# Altium PCB PCB1.PcbDoc
Units mm, origin at the board's own origin, x right, y up, seen from the top; angles counter-clockwise.
Board outline 90 x 41 mm, 2 copper layers (Top Layer, Bottom Layer); 51 components, 31 nets, 133 pads, 582 vias.
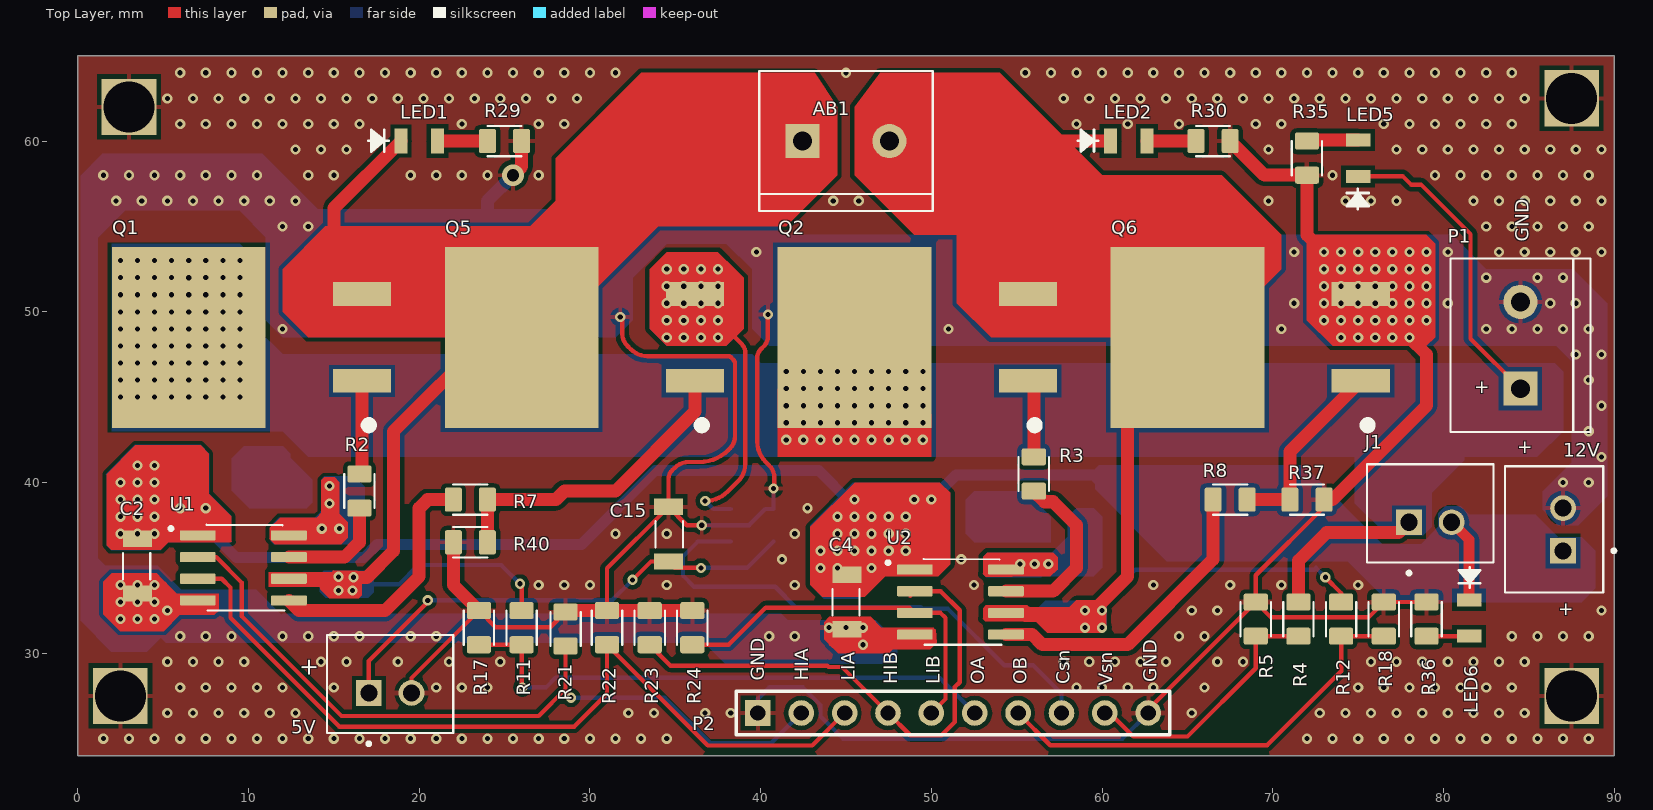
[diagram p0: Top Layer view]
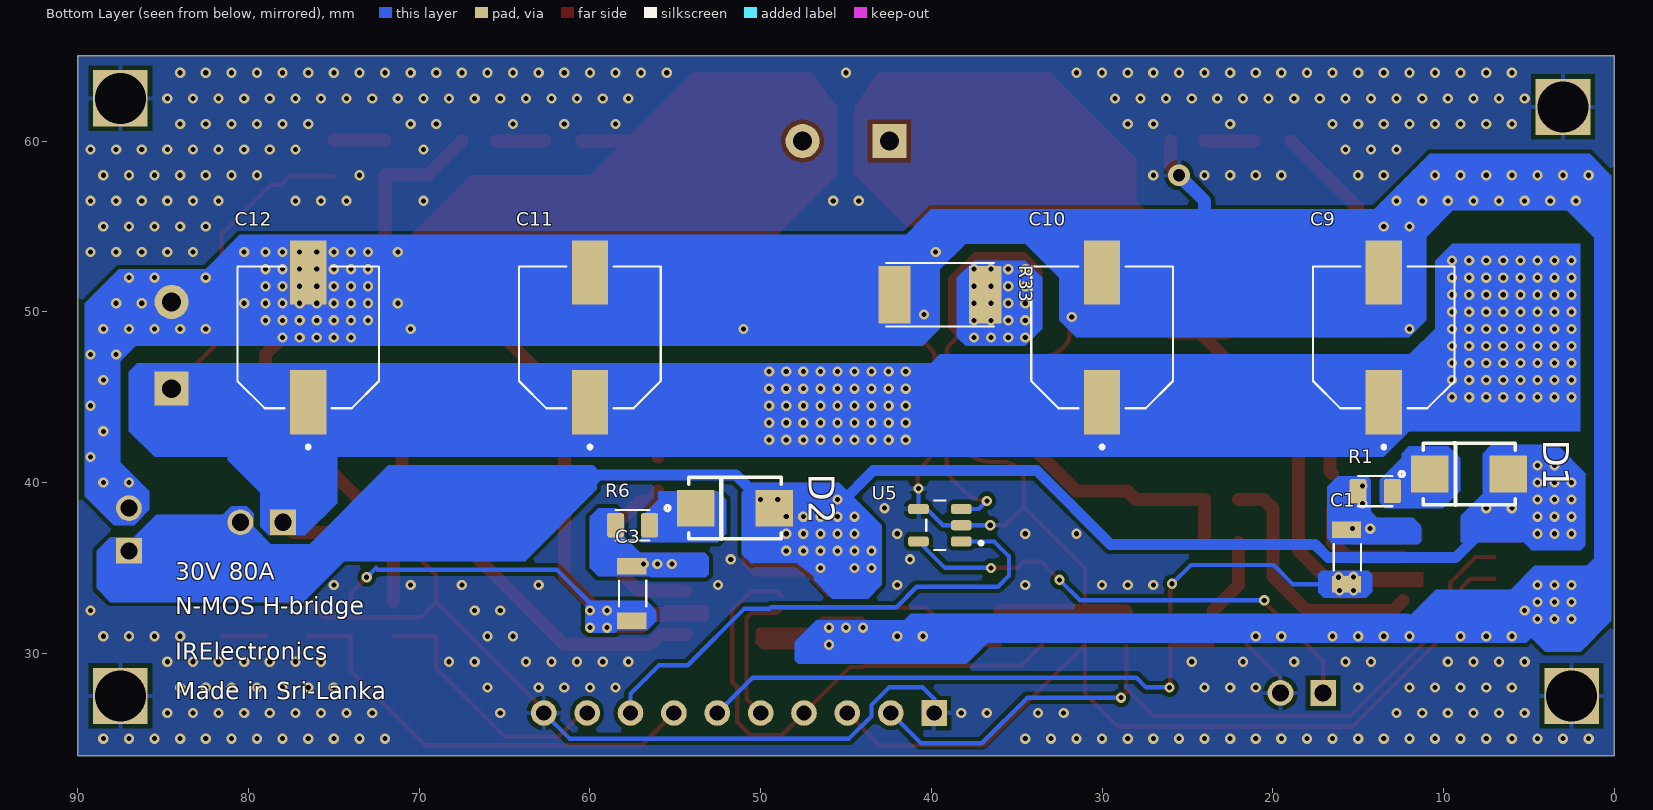
[diagram p1: Bottom Layer view, seen from below]
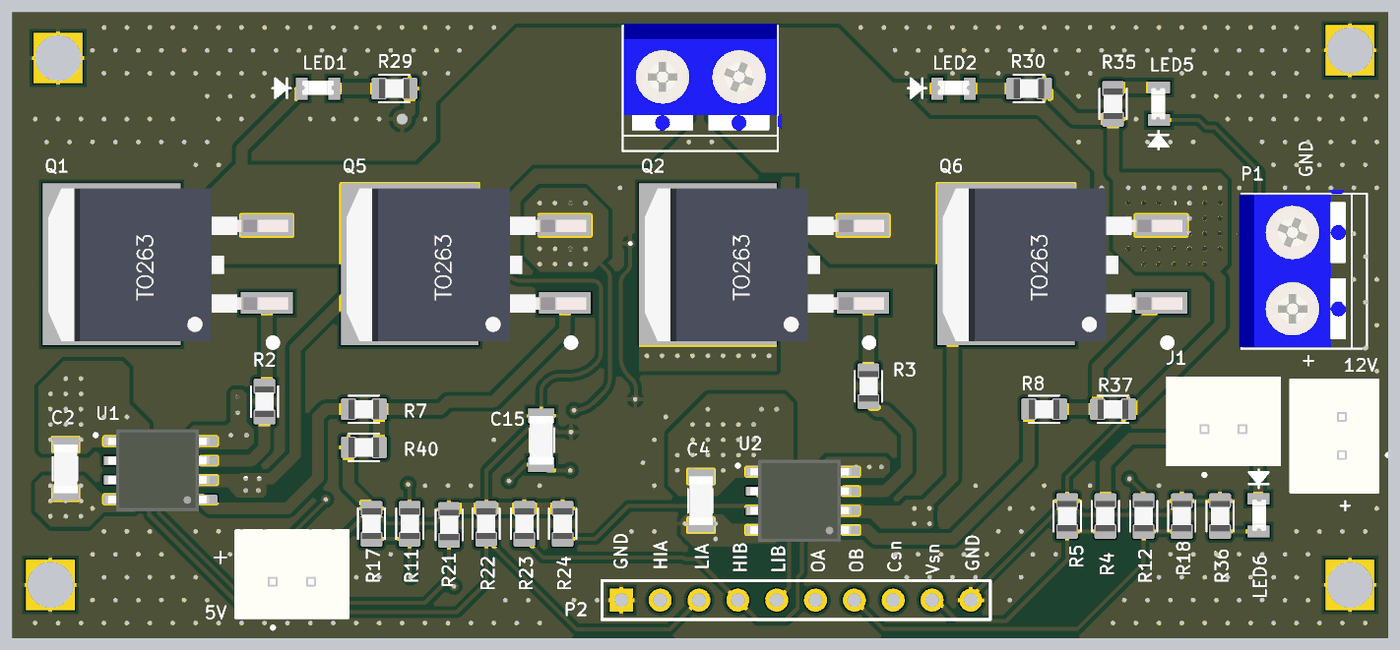
[diagram p2: 3D render of the assembled board from above, using the file's embedded part models]
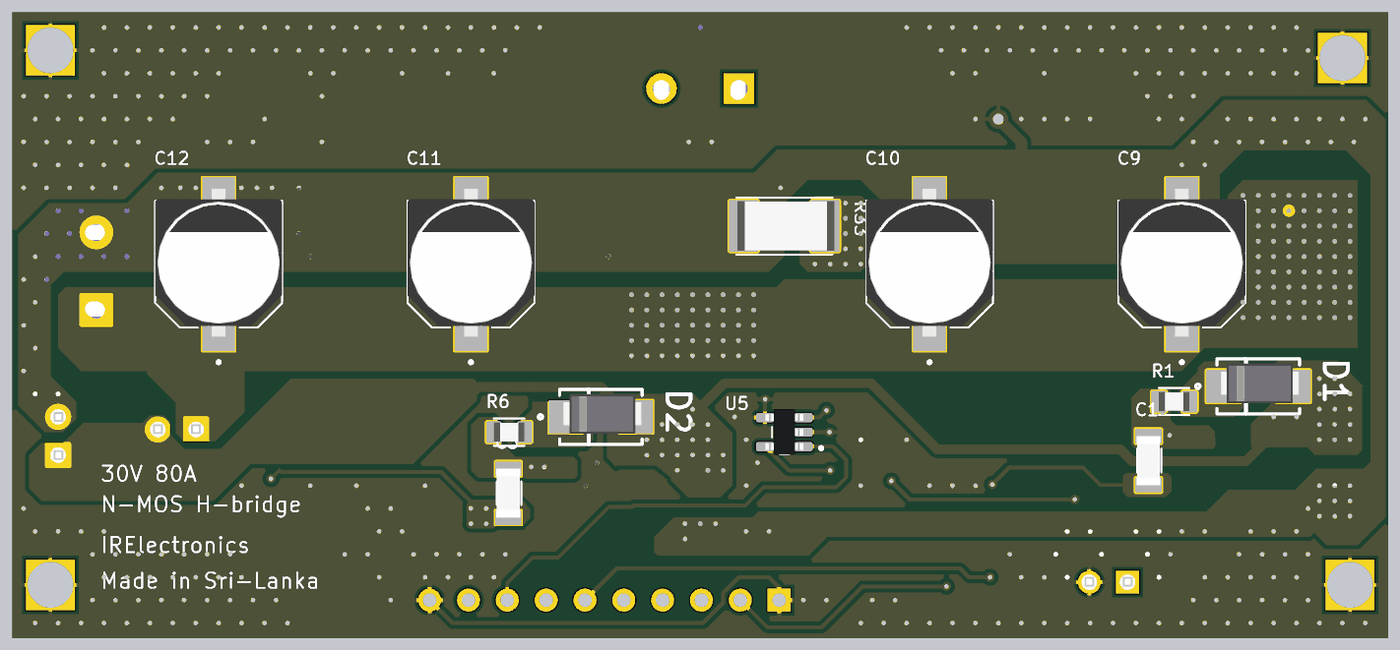
[diagram p3: 3D render of the assembled board from below, using the file's embedded part models]

## Layer stack, top to bottom
Top Solder: solder mask 0.0102, Solder Resist, Dk 3.5
Top Layer: signal copper 0.0356
Dielectric 1: dielectric 0.32, FR-4, Dk 4.8
Bottom Layer: signal copper 0.0356
Bottom Solder: solder mask 0.0102, Solder Resist, Dk 3.5

## Board outline
0,24 0,65 90,65 90,24

## Design rules (kind name [scope] priority, off if disabled: settings)
Clearance [All] p1: gap=0.254 ignorepadtopadclearanceinfootprint=FALSE except(0: Arc-Hole Track-Hole SMDPad-Hole THPad-Hole Via-Hole Fill-Hole Poly-Hole Region-Hole Text-Hole)
PolygonConnect [All] p1: connectstyle=Relief reliefconductorwidth=0.254 reliefentries=4 polygonreliefangle="90 Angle" airgapwidth=0.254
RoutingVias [All] p1: holewidth=0.711 width=1.27 viastyle="Through Hole" minholewidth=0.3 minwidth=0.6 maxholewidth=0.711 maxwidth=1.27
SolderMaskExpansion [All] p1: expansion=0.102
Width [All] p1: maxlimit=0.762 minlimit=0.254 preferedwidth=0.254
30 further rules are at their usual default settings.

## Classes and differential pairs
component class Sheet1: AB1 C1 C2 C3 C4 D1 D2 J1 P1 P2 Q1 Q2 Q5 Q6 R1 R2 R3 R6 R7 R8 R11 R12 R17 R18 R21 R22 R23 R24 R33 R37 R40 U1 U2
component class Sheet2: 5V 12V C9 C10 C11 C12 C15 LED1 LED2 LED5 LED6 R R4 R5 R29 R30 R35 R36 U5

## Components (designator, comment, footprint, x,y, rotation, side; value= is the part's Value field where it differs from the comment)
5V "B2B-XH-A(LF)(SN)" JST_B2B-XH-A(LF)(SN) 18.3,28.2 r0 top
12V "B2B-XH-A(LF)(SN)" JST_B2B-XH-A(LF)(SN) 86.475,37.25 r90 top
AB1 "282837-2" terminal 45,60 r0 top
C1 "c?" "cap 1206" 15.635,35.635 r90 bottom value=1uf
C2 "c?" "cap 1206" 3.45,35.1 r270 top value=10uf
C3 "c?" "cap 1206" 57.5,33.5 r90 bottom value=1uf
C4 "c?" "cap 1206" 45,33 r270 top value=10uf
C9 "C" CAP-8*10.2 13.5,48.5 r90 bottom value=100uf
C10 "C" CAP-8*10.2 30,48.5 r90 bottom
C11 "C" CAP-8*10.2 60,48.5 r90 bottom
C12 "C" CAP-8*10.2 76.5,48.5 r90 bottom
C15 "C" "cap 1206" 34.65,36.975 r90 top value=0.1uf
D1 "D" "do 214" 8.5,40.5 r180 bottom
D2 "D" "do 214" 51.5,38.5 r180 bottom
J1 "B2B-XH-A(LF)(SN)" JST_B2B-XH-A(LF)(SN) 79.225,38.2 r0 top
LED1 "L?" LED_0805 20,60 r0 top
LED2 "L?" LED_0805 61.567,60 r0 top
LED5 "L?" LED_0805 75,59 r90 top
LED6 "L?" LED_0805 81.5,32.067 r270 top
P1 "282837-2" terminal 84.5,48.04 r90 top
P2 "Header 10" HDR1X10 39.84,26.5 r0 top
Q1 "t?" TO-263AB 16.65,45.96 r0 top
Q2 "t?" TO-263AB 55.65,45.96 r0 top
Q5 "t?" TO-263AB 36.15,45.96 r0 top
Q6 "t?" TO-263AB 75.15,45.96 r0 top
R1 "r?" RES-0805 14,39.5 r180 bottom value=2.2
R2 "r?" RES-0805 16.5,39.5 r90 top value=4.7
R3 "r?" RES-0805 56,40.5 r90 top value=4.7
R4 "r?" RES-0805 71.5,32 r90 top value=5K
R5 "r?" RES-0805 69,32 r270 top value=1K
R6 "r?" RES-0805 57.5,37.5 r180 bottom value=2.2
R7 "r?" RES-0805 23,39 r0 top value=4.7
R8 "r?" RES-0805 67.5,39 r0 top value=4.7
R11 "r?" RES-0805 26,31.5 r90 top value=5k
R12 "r?" RES-0805 74,32 r90 top value=5k
R17 "r?" RES-0805 23.5,31.5 r270 top value=1k
R18 "r?" RES-0805 76.5,32 r270 top value=1k
R21 "r?" RES-0805 28.575,31.425 r270 top value=10k
R22 "r?" RES-0805 31,31.5 r270 top value=10k
R23 "r?" RES-0805 33.5,31.5 r270 top value=10k
R24 "r?" RES-0805 36,31.5 r270 top value=10k
R29 "r?" RES-0805 25,60 r180 top value=10K
R30 "r?" RES-0805 66.5,60 r180 top value=10K
R33 "1-1879378-6" 2512 39.5,51 r180 bottom value=0.0005
R35 "r?" RES-0805 72,59 r90 top value=10K
R36 "r?" RES-0805 79,32 r270 top value=10K
R37 "r?" RES-0805 72,39 r180 top value=39k
R40 "r?" RES-0805 23,36.5 r0 top value=39k
U1 "U" "SOIC 8N" 9.5,35 r0 top
U2 "U" "SOIC 8N" 51.5,33 r0 top
U5 "INA180A4-GAIN200" SOT23-5 39.5,37.5 r0 bottom

## Footprints (in the part's own frame and the unit in brackets; to place one, negate y for a bottom-side part, rotate by r counter-clockwise, add the part's x,y. Pads: shape width x height; smd on the part's side, far side on the other; paste and mask are expansions set on the pad)
2512 [mm]
  rrect7% 1.9x3.37 smd: 1(-2.66,0) 2(2.66,0)
  silkscreen extent -3.15,-1.87 3.15,1.87, body extent -3.07,-1.63 3.28,1.63, height 0.58
"cap 1206" [mm]
  rect 0.96x1.71 smd: 1(-1.6,0.05) 2(1.6,0.05)
  silkscreen extent -0.77,-0.8 0.77,0.8, body extent -1.6,-0.73 1.6,0.83, height 1.83
CAP-8*10.2 [mm]
  rect 3.77x2.12 smd: 1(-3.8,0) 2(3.8,0)
  silkscreen extent -6.52,-4.15 4.15,4.15, body extent -4.75,-4.15 4.95,4.15, height 8.5
"do 214" [mm]
  rect 2.2x2.15 smd: A(2.3,0) C(-2.3,0)
  silkscreen extent -4.09,-1.8 2.7,1.8, body extent -2.5,-1.1 2.7,1.5, height 2.5
HDR1X10 [mm] "Connector; Header; 10 Position"
  rect 1.5x1.5 hole 0.9: 1(0,0)
  round 1.5 hole 0.9: 2(2.54,0) 3(5.08,0) 4(7.62,0) 5(10.16,0) 6(12.7,0) 7(15.24,0) 8(17.78,0) 9(20.32,0) 10(22.86,0)
  silkscreen extent -1.27,-1.27 24.13,1.27
JST_B2B-XH-A(LF)(SN) [mm]
  rect 1.508x1.508 hole 1: 1(-1.25,-0.525)
  round 1.508 hole 1: 2(1.25,-0.525)
  silkscreen extent -3.7,-3.6 3.7,2.88, body extent -3.7,-2.87 3.7,2.88, height 7
LED_0805 [mil]
  rect 30x57 smd: 1(-42,0) 2(42,0)
  silkscreen extent -117,-24 -70,26, body extent -41,-16 41,20, height 33
RES-0805 [mm]
  rrect25% 1x1.42 smd: 1(-1,0) 2(1,0)
  silkscreen extent -1,-0.89 1,0.89, body extent -1,-0.63 1,0.63, height 0.43
"SOIC 8N" [mm]
  rrect25% 2.1x0.6 smd: 1(-2.47,1.905) 2(-2.47,0.635) 3(-2.47,-0.635) 4(-2.47,-1.905) 5(2.87,-1.905) 6(2.87,-0.635) 7(2.87,0.635) 8(2.87,1.905)
  silkscreen extent -4.14,-2.5 2.6,2.52, body extent -4.2,-2.69 4.2,2.69, height 2
SOT23-5 [mm]
  rrect50% 1.21x0.59 smd: 1(-1.255,0.95) 2(-1.255,0) 3(-1.255,-0.95) 4(1.255,-0.95) 5(1.255,0.95)
  silkscreen extent -2.51,-1.45 0.8,1.45, body extent -1.25,-1.5 1.25,1.5, height 1.05
terminal [mm]
  rect 2x2 hole 1.1: 1(-2.54,0)
  round 2 hole 1.1: 2(2.54,0)
  silkscreen extent -5.08,-4.1 5.08,4.1, body extent -4.96,-3.34 5.32,4.26, height 11.41
TO-263AB [mm]
  rect 3.4x1.4 smd: 1(0,5.08) 2(0,0)
  rect 9x10.6 smd: 3(-10.15,2.54)
  silkscreen extent 0.18,-2.82 0.62,-2.38, body extent -14.28,-2.5 1.39,7.5, height 5.18

## Part data
5V 12V J1: "Connector Header Through Hole 2 position 0.098 _2.50mm_", Package=None, Availability=Unavailable, MF="JST Sales", MP=B2B-XH-A_LF__SN_, Price=None, SnapEDA_Link=https://www.snapeda.com/parts/B2B-XH-A%28LF%29%28SN%29/JST%20Sales%20America%20Inc./view-part/492310/?ref=snap
AB1 P1: library part "terminal 2", "Connector Terminal Blocks Receptacle 2 Position 5.08mm Solder Straight Thru-Hole 13.5A/Contact", Package=None, Digi-Key_Part_Number=A113320-ND, Digi-Key_Purchase_URL=https://www.digikey.in/product-detail/en/te-connectivity-amp-connectors/282837-2/A113320-ND/2187973?utm_source=snapeda&utm_medium=aggregator&utm_campaign=symbol, MF="TE Connectivity", MP=282837-2, SnapEDA_Link=https://www.snapeda.com/parts/282837-2/TE%20Connectivity%20AMP%20Connectors/view-part/2549980/?ref=snap, TE_purchase_URL=https://www.te.com/usa-en/product-282837-2.html?te_bu=Cor&te_type=disp&te_campaign=seda_glo_cor-seda-global-disp-prtnr-fy19-seda-model-bom-cta_sma-317_1&elqCampaignId=32493
C1 C2 C3 C4 C15: library part "Cap 1206", "Film Capacitor", Package="1206 AVX", Availability=Unavailable, MF=AVX, MP=CB018B0103JBA, Price=None, SnapEDA_Link=https://www.snapeda.com/parts/CB018B0103JBA/AVX/view-part/2283023/?ref=snap
C9 C10 C11 C12: library part "Cap 8*10.2", "Film Capacitor", Package="1206 AVX", Availability=Unavailable, MF=AVX, MP=CB018B0103JBA, Price=None, SnapEDA_Link=https://www.snapeda.com/parts/CB018B0103JBA/AVX/view-part/2283023/?ref=snap
D1 D2: library part mura110, "Diode Schottky 30V 100mA Surface Mount GMD2", Package="0201 Rohm", Availability=Warning, DigiKey-Purchase-URL=https://snapeda.com/shop?store=DigiKey&id=119018, MF=Rohm, Mouser-Purchase-URL=https://snapeda.com/shop?store=Mouser&id=119018, MP=RB520ZS-30T2R, Price=None, SnapEDA_Link=https://www.snapeda.com/parts/RB520ZS-30T2R/Rohm/view-part/119018/?ref=snap
LED1 LED2 LED5 LED6: library part led-0805, "Kırmızı LED Göstergesi - Ayrık 2V 0805 (2012 Metrik)", Package="0805 VCC", Availability=Unavailable, DigiKey-Purchase-URL=https://snapeda.com/shop?store=DigiKey&id=570104, MF=Visual, MP=CMD17-21VRC/TR8, Price=None, SnapEDA_Link=https://www.snapeda.com/parts/CMD17-21VRC/TR8/Visual%20Communications%20Company%20-%20VCC/view-part/570104/?ref=snap
P2: "Header, 10-Pin", LatestRevisionDate=17-Jul-2002, LatestRevisionNote="Re-released for DXP Platform.", Publisher="Altium Limited"
Q1 Q2 Q5 Q6: library part n-mos, "N-Channel 60V 200mA _Ta_ 350mW _Tc_ Through Hole TO-92-3", Package="TO-92 Rochester Electronics", Digi-Key_Part_Number=2N7000GOS-ND, Digi-Key_Purchase_URL=https://www.digikey.ca/product-detail/en/on-semiconductor/2N7000G/2N7000GOS-ND/1475375?utm_source=snapeda&utm_medium=aggregator&utm_campaign=symbol, MF="ON Semiconductor", MP=2N7000G, SnapEDA_Link=https://www.snapeda.com/parts/2N7000G/ON%20Semiconductor/view-part/820965/?ref=snap
R1 R2 R3 R4 R5 R6 R7 R8 R11 R12 R17 R18 R21 R22 R23 R24 R29 R30 R35 R36 R37 R40: library part Res-0805, "Res, Thin Film, 16r5, 0.1%, 0.25w, 0805", Package="0805 TE Connectivity", Availability=Unavailable, MF="TE Connectivity", MP=RP73PF2A16R5BTDF, Price=None, SnapEDA_Link=https://www.snapeda.com/parts/RP73PF2A16R5BTDF/TE%20Connectivity/view-part/1047398/?ref=snap
R33: library part RES-2512, "TLR 2512 2.0W R006 1% 50PPM 2K RL", Package=2512, Power_Rating="2 W", Resistance=.006, Tolerance=1%, Availability=Warning, DigiKey-Purchase-URL=https://snapeda.com/shop?store=DigiKey&id=976058, EU_RoHS_Compliance=Compliant, MF="TE Connectivity", MP=TLR3A20DR006FTDG, Price=None, SnapEDA_Link=https://www.snapeda.com/parts/TLR3A20DR006FTDG/TE%20Connectivity%20Passive%20Product/view-part/976058/?ref=snap
U1 U2: library part LM5109BMA, "1-A, 100-V half bridge gate driver with 8-V UVLO and high noise immunity 8-SOIC -40 to 125", Package="SOIC-8 Texas Instruments", Availability=Warning, DigiKey-Purchase-URL=https://snapeda.com/shop?store=DigiKey&id=14856, MF="Texas Instruments", MP=LM5109BMA, Price=None, SnapEDA_Link=https://www.snapeda.com/parts/LM5109BMA/Texas%20Instruments/view-part/14856/?ref=snap
U5: "26V, 350kHz current sense amplifier 5-SOT-23 -40 to 125", Package="SOT-23-5 Texas Instruments", Availability=Good, DigiKey-Purchase-URL=https://snapeda.com/shop?store=DigiKey&id=1129654, MF="Texas Instruments", Mouser-Purchase-URL=https://snapeda.com/shop?store=Mouser&id=1129654, MP=INA180A3IDBVR, Price=None, SnapEDA_Link=https://www.snapeda.com/parts/INA180A3IDBVR/Texas%20Instruments/view-part/1129654/?ref=snap, Texas_Instruments-Purchase-URL=https://snapeda.com/shop?store=Texas+Instruments&id=1129654

## Free pads (board coordinates)
  rect 3.2x3.3 hole 3: 4(3,62) 5(87.5,62.5) 6(87.5,27.5) 7(2.5,27.5)

## Via types
v1: diameter 0.6, hole 0.3, Top Layer to Bottom Layer, tented both sides, 580 vias
v2: diameter 1.27, hole 0.711, Top Layer to Bottom Layer, tented both sides, 1 vias
v3: diameter 0.6, hole 0.31, Top Layer to Bottom Layer, 1 vias

## Nets (pads, with @x,y where several pads share a name; then routed paths per layer and width w, separated by ;. In a path a pad name is that pad's centre, name@x,y a point inside that pad or via, vN(x,y) a via of type N, cw(c..) or ccw(c..) an arc to the next point about the centre after c; other vN are vias at no path point)
5V: 5V.1 C15.1 U5.5 | length 28.8
  Top Layer w0.254: 5V.1 17.05,29.55 20.5,33 v1(20.5,33.1) ; v1(32.5,34.3) 33.575,35.375 C15.1 34.975,35 v1(36.5,35)
  Bottom Layer w0.254: v1(20.5,33.1) 31.3,33.1 v1(32.5,34.3) ; v1(36.5,35) 39.205,35 U5.5
12V: 12V.1 C2.1 C4.1 D1.A D2.A J1.2 LED6.1 U1.1 U2.1 | length 87.6
  Top Layer w0.635: J1.2 81.5,36.65 LED6.1
  Bottom Layer w0.635: 7.575,37.325 9.3,35.6 16.75,35.6 17.525,36.375 29.5,36.375 33.825,40.7 43.4,40.7 v1@45.25,38.85 ; 44.5,34.625 v1(44.5,35) ; v1(50,39) 51.45,40.45 59.5,40.45 64.15,35.8 78.65,35.8 80.475,37.625 J1.2 85.325,37.675 12V.1
  other v1: 43.5,35 46.5,35 43.5,36 44.5,36 45.5,36 46.5,36 47.5,36 48.5,36 2.5,37 3.5,37 4.5,37 44.5,37 45.5,37 46.5,37 47.5,37 48.5,37 2.5,38 3.5,38 4.5,38 44.5,38 45.5,38 46.5,38 47.5,38 48.5,38 6,38.5 7.5,38.5 2.5,39 3.5,39 4.5,39 45.5,39 49,39 2.5,40 3.5,40 4.5,40 3.5,41 4.5,41
HA: R2.1 U1.7 | length 6.5
  Top Layer w0.762: U1.7 15.635,35.635 16.5,36.5 R2.1
HB: R3.1 U2.7 | length 10.5
  Top Layer w0.762: U2.7 57.135,33.635 58.5,35 58.5,37.5 57.125,38.875 56.625,38.875 R3.1
HIA: P2.2 R21.2 U1.2 | length 45.7
  Top Layer w0.254: U1.2 8.115,35.635 9.6,34.15 9.6,32.175 15.45,26.325 27,26.325 28.575,27.9 ; R21.2 28.575,27.9 ; v1(28.9,27.4) 28.575,27.725 28.575,27.9
  Bottom Layer w0.254: v1(28.9,27.4) 34.375,27.4 37.05,24.725 40.605,24.725 P2.2
HIB: P2.4 R23.2 U2.2 | length 30.5
  Top Layer w0.254: R23.2 34.725,29.275 43.9,29.275 43.975,29.2 44.76,29.2 P2.4 48.76,25.2 50.6,25.2 51.375,25.975 51.375,28.025 51.658,28.308 51.658,32.517 50.54,33.635 U2.2 U2.2@48.77,33.375
LA: R7.1 U1.5 | length 14.9
  Top Layer w0.762: U1.5 12.965,32.5 18,32.5 20,34.5 20,38.5 20.5,39 R7.1
LB: R8.1 U2.5 | length 17.9
  Top Layer w0.762: U2.5 55.905,31.095 56.5,30.5 61.5,30.5 66.5,35.5 R8.1
LIA: P2.3 R22.2 U1.3 | length 49.4
  Top Layer w0.254: U1.3 8.435,34.365 8.95,33.85 8.95,32.075 15.325,25.7 29.075,25.7 31,27.625 R22.2 36.9,24.6 43.02,24.6 P2.3
LIB: P2.5 R24.2 U2.3 | length 21.9
  Top Layer w0.254: R24.2 38.125,30.5 40.3,32.675 48.72,32.675 U2.3 50.535,32.365 50.825,32.075 50.825,27.325 P2.5
NetC1_2: C1.2 R1.1 U1.8
  other v1: 14.3,37.3 15.325,37.3 14.75,38.775 14.75,39.8
NetC3_2: C3.2 R6.1 U2.8
  other v1: 55.2,35.225 56.05,35.225 56.85,35.225
NetD1_C: D1.C R1.2
NetD2_C: D2.C R6.2
NetLED1_2: LED1.2 R29.2 | length 2.9
  Top Layer w0.762: LED1.2 R29.2
NetLED2_2: LED2.2 R30.2 | length 2.9
  Top Layer w0.762: LED2.2 R30.2
NetLED5_2: LED5.2 R35.2 | length 3
  Top Layer w0.762: R35.2 72.067,60.067 LED5.2
NetLED6_2: LED6.2 R36.2 | length 2.5
  Top Layer w0.254: R36.2 LED6.2
NetQ1_2: Q1.2 R2.2 | length 5.5
  Top Layer w0.762: R2.2 16.65,40.65 Q1.2
NetQ2_2: Q2.2 R3.2 | length 4.6
  Top Layer w0.762: Q2.2 56,45.61 R3.2
NetQ5_2: Q5.2 R7.2 R40.2 | length 18.6
  Top Layer w0.762: R40.2 R7.2 28,39 28.5,39.5 31.5,39.5 36.15,44.15 Q5.2
NetQ6_2: Q6.2 R8.2 R37.2 | length 11.6
  Top Layer w0.254: R8.2 68.5,38.795 69,38.795 69,39
  Top Layer w0.762: 69,39 R37.2 71,41.81 Q6.2
OA: P2.6 R11.1 R17.2 | length 32.6
  Top Layer w0.254: R17.2 26,30.5 26,28.05 v1(26.05,28)
  Bottom Layer w0.254: v1(26.05,28) 27.425,28 28,28.575 50.465,28.575 P2.6
OB: P2.7 R12.1 R18.2 | length 26
  Top Layer w0.254: P2.7 56.963,24.617 69.667,24.617 74,28.95 R12.1 R18.2
OUTA: AB1.1 C1.1 LED1.1 Q1.1 Q5.3 R11.2 U1.6 | length 48.6
  Top Layer w0.254: Q1.1 20.042,51.04 22.582,48.5 24,48.5 Q5.3 ; v1(25.9,34.075) 26,33.975 R11.2
  Top Layer w0.762: 15,54 15,56.067 LED1.1 ; v1(16.15,34.45) 16.95,34.45 18.5,36 18.5,43 Q5.3@24,48.5
  Bottom Layer w0.254: C1.1 18.81,34.035 19.95,35.175 24.8,35.175 v1(25.9,34.075)
  other v1: 15.275,33.675 16.1,33.675 15.275,34.475
OUTB: AB1.2 C3.1 LED2.1 Q2.1 Q6.3 R12.2 U2.6 | length 52.3
  Top Layer w0.254: Q2.1 59.031,51.04 61.571,48.5 Q6.3 ; v1(73.075,34.45) 74,33.525 R12.2
  Top Layer w0.762: 54.25,62 56.25,60 LED2.1 ; 59.5,32.5 61.5,34.5 61.5,45 Q6.3
  Bottom Layer w0.254: 59.625,32.575 61.95,34.9 72.425,34.9 72.525,35 v1(73.075,34.45)
  other v1: 59,31.5 60,31.5 59,32.5 60,32.5
SENSEA: P2.8 U5.1 | length 30.4
  Bottom Layer w0.254: U5.1 36.325,36.55 35.45,35.675 35.45,34.55 36.1,33.9 40.85,33.9 42.05,32.7 49.375,32.7 49.475,32.6 50.975,32.6 54.275,29.3 55.95,29.3 57.62,27.63 P2.8
SHA: Q5.1 R33.2 U5.3 | length 14.4
  Top Layer w0.254: v1(36.75,38.925) ccw(c36.75,40.796) 38.073,39.473 38.676,40.076 ccw(c37.651,41.1) 39.1,41.1 39.1,47.6 ccw(c38.376,47.6) 38.888,48.112 v1(37.5,49.5) ; 38.475,49.175 38.475,49.35
  Bottom Layer w0.254: v1(36.75,38.925) 37.225,38.45 U5.3
  other v1: 34.5,48.5 35.5,48.5 36.5,48.5 37.5,48.5 34.5,49.5 35.5,49.5 36.5,49.5 34.5,50.5 35.5,50.5 36.5,50.5 37.5,50.5 34.5,51.5 35.5,51.5 36.5,51.5 37.5,51.5 34.5,52.5 35.5,52.5 36.5,52.5 37.5,52.5
SLA: 5V.2 12V.2 C2.2 C4.2 C9.2 C10.2 C11.2 C12.2 C15.2 P1.2 P2.1 P2.10 pad.4 pad.5 pad.6 pad.7 Q6.1 R5.1 R17.1 R18.1 R21.1 R22.1 R23.1 R24.1 R29.1 R30.1 R33.1 R35.1 R36.1 R37.1 R40.1 U1.4 U2.4 U5.2 U5.4 | length 166.7
  Top Layer w0.254: 5V.2 19.55,28.55 R17.1 24.475,31.525 27.675,31.525 R21.1 ; R22.1 31,34.975 C15.2 ; v1(31.775,49.7) cw(c31.473,49.398) 31.9,49.398 31.9,48.7 ccw(c32.866,48.7) 32.183,48.017 ; 32.183,48.017 32.4,47.8 ccw(c33.366,48.766) 33.366,47.4 38.1,47.4 cw(c38.1,47.159) 38.271,47.329 38.4,47.2 cw(c38.159,46.959) 38.5,46.959 38.5,42.7 cw(c37.534,42.7) 38.217,42.017 38.1,41.9 cw(c36.41,43.59) 36.41,41.2 35.8,41.2 ccw(c35.8,39.993) 34.946,40.846 34.812,40.712 ccw(c35.324,40.2) 34.6,40.2 C15.2 ; v1(36.55,37.5) 35.675,37.5 C15.2 ; v1(40.425,49.85) 40.425,48.543 cw(c39.657,48.543) 40.2,48 40.012,47.812 ccw(c40.524,47.3) 39.8,47.3 39.8,42.407 ccw(c41.507,42.407) 40.3,41.2 40.517,40.983 cw(c39.834,40.3) 40.8,40.3 40.8,39.771 cw(c40.629,39.771) v1(40.75,39.65) v1@40.75,39.825 ; P2.10 62.7,26.7 R5.1 ; R37.1 73,38.575 69,34.575 R5.1 ; R36.1 R18.1 75.6,32.1 69.9,32.1 R5.1
  Top Layer w0.762: R40.1 22,34 R17.1 ; v2(25.5,58) 26,58.5 R29.1 ; R21.1 28.65,32.5 R22.1 R23.1 R24.1@36,32.5 ; R30.1 69.5,58 R35.1 72,54.5 v1(73,53.5) ; R37.1 73.5,39 79,44.5 79,47.5 v1(78,48.5)
  Bottom Layer w0.254: v1(36.55,37.5) U5.2 39.325,37.5 40.275,38.45 U5.4 40.755,39.645 v1(40.75,39.65) ; P2.1 39.84,27.34 40.5,28 42.479,28 43.511,26.969 43.511,26.31 44.821,25 61.2,25 P2.10
  Bottom Layer w0.762: 24,54 24,56.5 v2(25.5,58) ; 85.85,49.8 88,47.65 88,46 88,39.5 12V.2
  other v1: 1.5,25 3,25 4.5,25 6,25 7.5,25 9,25 10.5,25 12,25 13.5,25 15,25 16.5,25 18,25 19.5,25 21,25 22.5,25 24,25 25.5,25 27,25 28.5,25 30,25 31.5,25 33,25 34.5,25 72,25 73.5,25 75,25 76.5,25 78,25 79.5,25 81,25 82.5,25 84,25 85.5,25 87,25 88.5,25 5.25,26.5 6.75,26.5 8.25,26.5 9.75,26.5 11.25,26.5 12.75,26.5 32.25,26.5 33.75,26.5 36.75,26.5 38.25,26.5 65.25,26.5 72.75,26.5 74.25,26.5 75.75,26.5 77.25,26.5 78.75,26.5 80.25,26.5 81.75,26.5 83.25,26.5 84.75,26.5 6,28 7.5,28 9,28 10.5,28 12,28 15,28 21,28 22.5,28 24,28 58.5,28 60,28 61.5,28 63,28 66,28 75,28 76.5,28 78,28 79.5,28 81,28 82.5,28 84,28 5.25,29.5 6.75,29.5 8.25,29.5 9.75,29.5 14.25,29.5 15.75,29.5 18.75,29.5 21.75,29.5 24.75,29.5 57.75,29.5 59.25,29.5 60.75,29.5 62.25,29.5 63.75,29.5 66.75,29.5 68.25,29.5 75.75,29.5 77.25,29.5 78.75,29.5 80.25,29.5 81.75,29.5 83.25,29.5 84.75,29.5 46,30.5 6,31 7.5,31 9,31 12,31 13.5,31 15,31 16.5,31 19.5,31 21,31 40.5,31 42,31 64.5,31 66,31 84,31 85.5,31 87,31 88.5,31 44,31.5 45,31.5 46,31.5 2.5,32 3.5,32 4.5,32 5.25,32.5 65.25,32.5 66.75,32.5 89.25,32.5 2.5,33 3.5,33 4.5,33 2.5,34 3.5,34 4.5,34 27,34 28.5,34 30,34 34.5,34 42,34 52.5,34 63,34 67.5,34 70.5,34 75,34 41.25,35.5 51.75,35.5 31.5,37 34.5,37 42,37 42.75,38.5 87,40 88.5,40 89.25,41.5 88.5,43 89.25,44.5 88.5,46 87.75,47.5 89.25,47.5 74,48.5 75,48.5 76,48.5 77,48.5 12,49 51,49 70.5,49 82.5,49 84,49 85.5,49 87,49 88.5,49 73,49.5 74,49.5 75,49.5 76,49.5 77,49.5 78,49.5 79,49.5 71.25,50.5 73,50.5 74,50.5 75,50.5 76,50.5 77,50.5 78,50.5 79,50.5 80.25,50.5 86.25,50.5 87.75,50.5 73,51.5 74,51.5 75,51.5 76,51.5 77,51.5 78,51.5 79,51.5 82.5,52 85.5,52 87,52 73,52.5 74,52.5 75,52.5 76,52.5 77,52.5 78,52.5 79,52.5 39.75,53.5 71.25,53.5 74,53.5 75,53.5 76,53.5 77,53.5 78,53.5 79,53.5 80.25,53.5 83.25,53.5 84.75,53.5 86.25,53.5 87.75,53.5 89.25,53.5 12,55 13.5,55 82.5,55 84,55 85.5,55 87,55 88.5,55 2.25,56.5 3.75,56.5 5.25,56.5 6.75,56.5 8.25,56.5 9.75,56.5 11.25,56.5 12.75,56.5 44.25,56.5 45.75,56.5 69.75,56.5 74.25,56.5 75.75,56.5 77.25,56.5 81.75,56.5 83.25,56.5 84.75,56.5 86.25,56.5 87.75,56.5 89.25,56.5 1.5,58 3,58 4.5,58 6,58 7.5,58 9,58 10.5,58 13.5,58 15,58 19.5,58 21,58 22.5,58 24,58 27,58 73.5,58 79.5,58 81,58 82.5,58 84,58 85.5,58 87,58 88.5,58 12.75,59.5 14.25,59.5 15.75,59.5 69.75,59.5 77.25,59.5 78.75,59.5 80.25,59.5 81.75,59.5 83.25,59.5 84.75,59.5 86.25,59.5 87.75,59.5 89.25,59.5 6,61 7.5,61 9,61 10.5,61 12,61 13.5,61 15,61 16.5,61 22.5,61 27,61 28.5,61 58.5,61 61.5,61 64.5,61 69,61 70.5,61 76.5,61 78,61 79.5,61 81,61 82.5,61 84,61 5.25,62.5 6.75,62.5 8.25,62.5 9.75,62.5 11.25,62.5 12.75,62.5 14.25,62.5 15.75,62.5 17.25,62.5 18.75,62.5 20.25,62.5 21.75,62.5 23.25,62.5 24.75,62.5 26.25,62.5 27.75,62.5 29.25,62.5 57.75,62.5 59.25,62.5 60.75,62.5 62.25,62.5 63.75,62.5 65.25,62.5 66.75,62.5 68.25,62.5 69.75,62.5 71.25,62.5 72.75,62.5 74.25,62.5 75.75,62.5 77.25,62.5 78.75,62.5 80.25,62.5 81.75,62.5 83.25,62.5 84.75,62.5 6,64 7.5,64 9,64 10.5,64 12,64 13.5,64 15,64 16.5,64 18,64 19.5,64 21,64 22.5,64 24,64 25.5,64 27,64 28.5,64 30,64 31.5,64 45,64 55.5,64 57,64 58.5,64 60,64 61.5,64 63,64 64.5,64 66,64 67.5,64 69,64 70.5,64 72,64 73.5,64 75,64 76.5,64 78,64 79.5,64 81,64 82.5,64 84,64
VCC: C9.1 C10.1 C11.1 C12.1 J1.1 LED5.1 P1.1 Q1.3 Q2.3 R4.2 | length 34.8
  Top Layer w0.254: v1(9.5,51) v1(9.5,52) v1(9.5,53) ; LED5.1 77.617,57.933 78.1,57.45 78.675,57.45 81.575,54.55 81.575,48.425 P1.1
  Top Layer w0.762: R4.2 71.5,35.425 73.15,37.075 77.375,37.075 J1.1
  Bottom Layer w0.762: J1.1 77.975,42.375
  other v1: 41.5,42.5 42.5,42.5 43.5,42.5 44.5,42.5 45.5,42.5 46.5,42.5 47.5,42.5 48.5,42.5 49.5,42.5 41.5,43.5 42.5,43.5 43.5,43.5 44.5,43.5 45.5,43.5 46.5,43.5 47.5,43.5 48.5,43.5 49.5,43.5 41.5,44.5 42.5,44.5 43.5,44.5 44.5,44.5 45.5,44.5 46.5,44.5 47.5,44.5 48.5,44.5 49.5,44.5 2.5,45 3.5,45 4.5,45 5.5,45 6.5,45 7.5,45 8.5,45 9.5,45 41.5,45.5 42.5,45.5 43.5,45.5 44.5,45.5 45.5,45.5 46.5,45.5 47.5,45.5 48.5,45.5 49.5,45.5 2.5,46 3.5,46 4.5,46 5.5,46 6.5,46 7.5,46 8.5,46 9.5,46 41.5,46.5 42.5,46.5 43.5,46.5 44.5,46.5 45.5,46.5 46.5,46.5 47.5,46.5 48.5,46.5 49.5,46.5 2.5,47 3.5,47 4.5,47 5.5,47 6.5,47 7.5,47 8.5,47 9.5,47 2.5,48 3.5,48 4.5,48 5.5,48 6.5,48 7.5,48 8.5,48 9.5,48 2.5,49 3.5,49 4.5,49 5.5,49 6.5,49 7.5,49 8.5,49 9.5,49 2.5,50 3.5,50 4.5,50 5.5,50 6.5,50 7.5,50 8.5,50 9.5,50 2.5,51 3.5,51 4.5,51 5.5,51 6.5,51 7.5,51 8.5,51 2.5,52 3.5,52 4.5,52 5.5,52 7.5,52 8.5,52 2.5,53 3.5,53 4.5,53 5.5,53 6.5,53 7.5,53 8.5,53
  other v3: 6.5,52
VSENSE: P2.9 R4.1 R5.2 | length 15.4
  Top Layer w0.254: P2.9 60.45,26.5 61.825,25.125 65,25.125 69,29.125 R5.2 R4.1

## Polygon pours and split planes (outlines as drawn)
SLA on Bottom Layer "Top Layer-No Net" (solid, remove dead copper, pour order 0): 90,65 90,24 0,24 0,65
SLA on Top Layer "Top Layer-No Net" (solid, remove dead copper, pour order 2): 90,65 90,24 0,24 0,65

## Other copper
Top Layer:
  region net VCC: 41,45.5 41,41.5 50,41.5 50,44
  region net SHA: 38.5,52.5 37.5,53.5 34.5,53.5 33.5,52.5 33.5,49 34.5,48 38,48 39,49 39,52
  region net SLA: 79,54.5 72.5,54.5 72,54 72,49.5 73.5,48 79,48 79.5,48.5 79.5,54
  region net OUTA: 30,51 34,55 41.5,55 44.5,58 44.5,62 43.167,64 33,64 28,59 28,56.5 26.5,55 23,55 21.5,53.5 21.5,49.5
  region net OUTB: 45.5,62 45.5,58 49,54.5 58,54.5 61,51.5 69.5,51.5 70.5,52.5 70.5,54.5 67,58 60,58 54,64 47,64
  region net OUTA: 25.5,55 14.5,55 12,52.5 12,50 13.5,48.5 22,48.5
  region net OUTB: 60.5,48.5 53.5,48.5 51.5,50.5 51.5,55.5 52,56
  region net OUTB: 52,56 59.5,56 62.5,53 62,52.5 62,48.5 60.5,48.5
  region net OUTA: 11.2,34.75 14.875,34.75 14.975,34.85 15,34.825 16.375,34.825 16.625,34.575 16.625,33.4 16.45,33.225 14.725,33.225 14.2,33.75 14.2,33.825 14.125,33.9 11.2,33.9
  region net NetC1_2: 11.25,36.7 11.25,37.35 11.85,37.95 14,37.95 14.275,38.225 14.275,40.125 14.45,40.3 15.05,40.3 15.325,40.025 15.325,38.175 15.825,37.675 15.825,36.775 15.425,36.375 11.55,36.375 11.225,36.7
  region net 12V: 9.025,36.525 9,36.55 9,38.025 7.675,39.35 7.675,41.7 7.2,42.175 3.375,42.175 1.7,40.5 1.7,36.325 1.95,36.075 4.875,36.075 5.3,36.5 8.925,36.5 8.95,36.525
  region net SLA: 8.25,33.5 5.8,33.5 5.225,34.075 5.2,34.075 5.2,34.1 4.95,34.35 2.675,34.35 2.4,34.075 2.4,32.9 2.675,32.625 2.7,32.625 2.7,32.6 3.05,32.25 8,32.25 8.25,32.5
  region net SLA: 6,32.275 5.025,31.3 2.5,31.3 1.5,32.3 1.5,34.175 2,34.675 4.625,34.675 4.95,34.35
  region net 12V: 50.5,34.6 51.1,35.2 51.1,39.4 50.5,40 45.5,40 42.9,37.4 42.9,34 43.6,33.3 46.1,33.3 47.3,34.5 50.4,34.5 50.5,34.6
  region net NetC3_2: 53.175,34.475 53,34.65 53.025,34.675 53.025,35.65 53.275,35.9 57.125,35.9 57.4,35.625 57.4,34.9 57.375,34.9 56.975,34.5 54.75,34.5 54.725,34.475
  region net OUTB: 54.3,31.875 53.15,31.875 53,32.025 53.025,32.05 53.025,32.65 53.2,32.825 55.625,32.825 55.75,32.7 58.075,32.7 58.475,33.1 59.95,33.1 60.275,32.775 60.25,32.75 60.25,31.45 60,31.2 56.8,31.2 56.15,31.85 55.4,31.85
  region net SLA: 50.25,31.375 50.15,31.475 50.15,31.5 47.075,31.5 46.45,32.125 44.025,32.125 43.725,31.825 43.725,30.825 44.325,30.225 49.925,30.225 50.325,30.625
  region net SLA: 44.325,30.225 44.55,30 47.5,30 48,30.5 44,30.5
Bottom Layer:
  region net 12V: 86.5,36.8 88.1,36.8 88.9,36 88.9,33.8 88.1,33 76.8,33 74.4,35.4 63.8,35.4 59.6,39.6 59.6,40.8 59.8,41 71.8,41 76.4,36.4 78.7,36.4 79.7,37.4 79.7,38.2 80.1,38.6 81,38.6 81.5,38.1 85.4,38.1 86.8,36.7
  region net SLA: 87,52.5 87.6,52.5 89.6,50.5 89.6,39.2 87.9,37.5 86.7,37.5 85.8,38.4 85.8,39.5 87.5,41.2 87.5,47.1 86.6,48 86.5,48 86.5,48.5 86,49
  region net VCC: 76.7,36.9 74.8,38.8 74.8,41.6 75.2,42 81.2,42 81.2,41.3 79.3,39.4 79.3,37.4 78.8,36.9
  region net SLA: 87,52.5 82.5,52.5 80.5,54.5 41.5,54.5 39.5,52.5 39.5,49 40.5,48 86.5,48 87,48.5
  region net SLA: 39.5,52.5 38,54 34.5,54 32.5,52 32.5,49.5 31.5,48.5 12,48.5 11,49.5 11,54.5 12.5,56 36,56 38,54
  region net SLA: 39.5,52.5 36,56 40,56 42,54 42,53.5 40.5,52 39.5,52
  region net VCC: 86.5,47 87,46.5 87,43 85.5,41.5 13.5,41.5 11,44 11,46.5 12,47.5 39.5,47.5 40,47
  region net VCC: 12,47.5 10.5,49 10.5,53 9.5,54 2,54 2,43 12.5,43
  region net VCC: 86,47 86,44 85.5,43.5 5.5,43.5 3.5,45.5 3.5,50 4.5,51 8.5,51 10,49.5 10,48.5 11.5,47
  region net SLA: 86,49 86,52 43.5,52 40,55.5 13.5,55.5 12,54 12,51.5 13,50.5 29,50.5 33,54.5 38,54.5 43.5,49
  region net SHA: 38.5,52 37.5,53 34.5,53 33.5,52 33.5,49 34.5,48 38,48 38.5,48.5
  region net NetC1_2: 14.825,36.8 14.825,37.75 14.25,38.325 14.25,40.175 14.45,40.375 16.2,40.375 16.825,39.75 16.825,36.725 16.5,36.4 15.125,36.4 14.775,36.75 14.8,36.775 14.8,37.725
  region net NetD1_C: 13.725,39.9 13.725,40.175 12.45,41.45 12.45,41.7 12.025,42.125 9.725,42.125 9.025,41.425 9.025,39.525 10.05,38.5 13.425,38.5 13.75,38.825 13.75,39.95
  region net NetC1_2: 11.325,37.125 11.325,37.5 11.8,37.975 11.825,37.95 13.875,37.95 14.525,38.6 14.8,38.6 14.8,37.725 15.6,36.925 15.125,36.45 15.125,36.4 11.475,36.4 11.3,36.575 11.3,37.275
  region net 12V: 9,36.5 9,38.05 7.675,39.375 7.7,39.4 7.7,41.7 7.2,42.2 3.35,42.2 1.65,40.5 1.7,40.45 1.7,36.3 1.975,36.025 4.875,36.025 4.875,36.075 5.325,36.525 5.35,36.5
  region net SLA: 14.15,55.975 14.075,55.975 10.8,59.25 1.45,59.25 0.175,57.975 0.175,31.9 1.975,30.1 4.05,30.1 6.075,32.125 6.075,33.725 4.675,35.125 1.625,35.125 1.175,35.575 1.175,54.35 2.775,55.95 9.45,55.95 11.025,54.375
  region net NetD2_C: 57,38 56,39 56,39.5 52.5,39.5 52,39 52,37 52.5,36.5 57,36.5
  region net 12V: 50.5,35.2 51.1,35.8 51.1,39.4 50.5,40 45.4,40 42.9,37.5 42.9,34 43.7,33.2 45.8,33.2 46.9,34.3 46.9,34.5 47.9,35.3 48.5,35.3 50.5,35.3
  region net NetC3_2: 58,38 58.5,38.5 59.5,38.5 60,38 60,35 59.5,34.5 56.5,34.5 56.5,35.325 58,36.825
  region net NetC3_2: 57.075,35.875 53.275,35.875 53.025,35.625 53.025,34.65 53.225,34.45 56.45,34.45 56.725,34.725 56.925,34.725
  region net OUTB: 56.375,32.7 56.325,32.7 56.125,32.5 56.125,31.875 56.65,31.35 58.375,31.35 58.525,31.2 60.05,31.2 60.275,31.425 60.275,32.8 59.975,33.1 59.95,33.075 56.675,33.075 56.325,32.725
  region net OUTA: 17.125,34.825 14.4,34.825 14.175,34.6 14.175,33.6 14.525,33.25 17.025,33.25 17.35,33.575 17.35,34.625 17.175,34.8 17.15,34.8
  region net SLA: 6.075,33.725 10.45,33.725 11.925,32.25 12,32.325 41.2,32.325 41.6,31.925 46.75,31.925 48,30.675 48,29.6 47.8,29.4 37.925,29.4 36.7,30.625 5.15,30.625 4.2,31.575

## Silkscreen, mask and mechanical layers (free items; w line width, h text height)
Top Overlay:
  text "GND" at 85,54.1 h0.8 r90
  text "+" at 82.6,45.1 h0.8 r90
  text "+" at 85.1,41.6 h0.8 r90
  text "+" at 87.5,32.1 h0.8 r90
  text "+" at 14,28.6 h1 r90
  text "GND" at 40.2,28.4 h0.8 r90
  text "HIA" at 42.8,28.4 h0.8 r90
  text "LIA" at 45.5,28.4 h0.8 r90
  text "GND" at 63.2,28.3 h0.8 r90
  text "HIB" at 48,28.2 h0.8 r90
  text "LIB" at 50.5,28.2 h0.8 r90
  text "OA" at 53.1,28.2 h0.8 r90
  text "OB" at 55.6,28.2 h0.8 r90
  text "Csn" at 58.1,28.2 h0.8 r90
  text "Vsn" at 60.6,28.1 h0.8 r90
Bottom Overlay:
  text "30V 80A" at 84.3,34.3 h1
  text "N-MOS H-bridge" at 84.3,32.3 h1
  text "IRElectronics" at 84.3,29.633 h1
  text "Made in Sri-Lanka" at 84.3,27.3 h1
Mechanical 1:
  the board outline again, w0.254